# Altium PCB Sonar_Amp_Mcu_PCB.PcbDoc
Units mm, origin at the board's own origin, x right, y up, seen from the top; angles counter-clockwise.
Board outline 34 x 22 mm, 2 copper layers (Top Layer, Bottom Layer); 3 components, 16 nets, 32 pads, 0 vias.
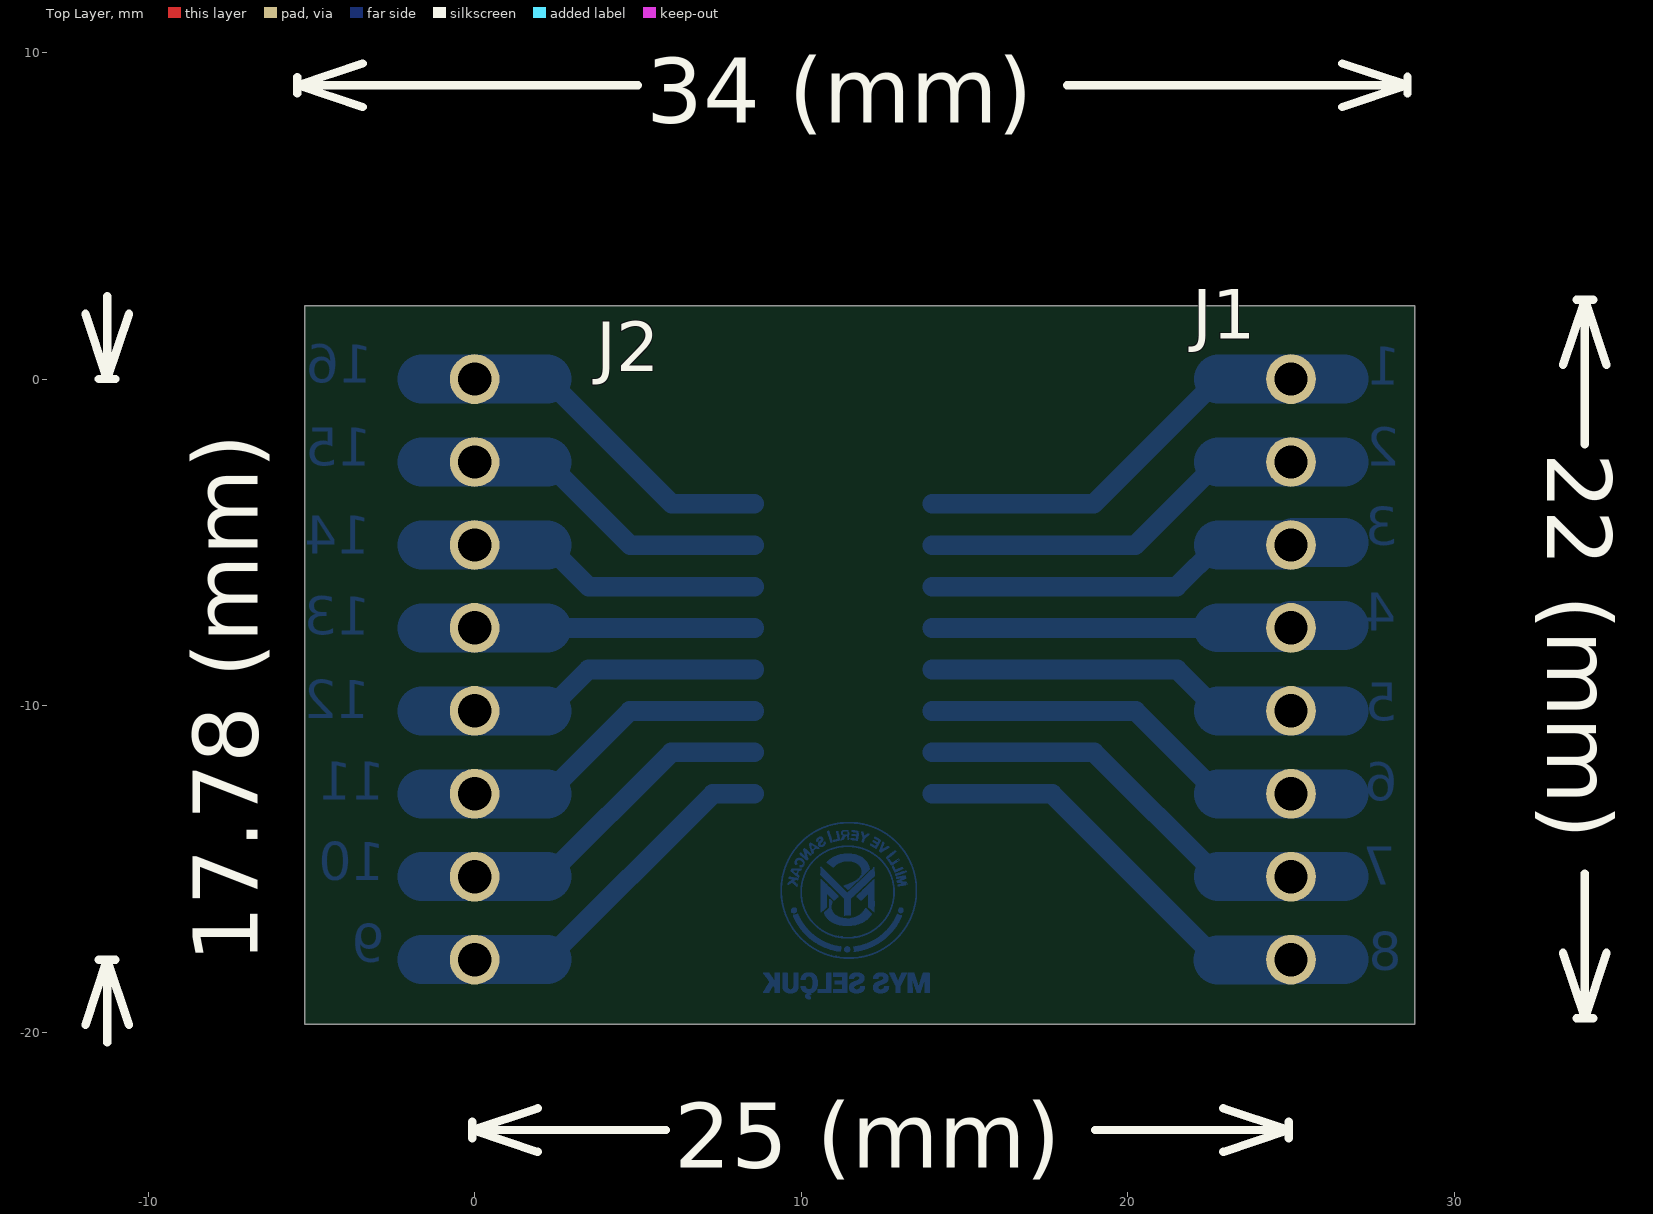
[diagram p0: Top Layer view]
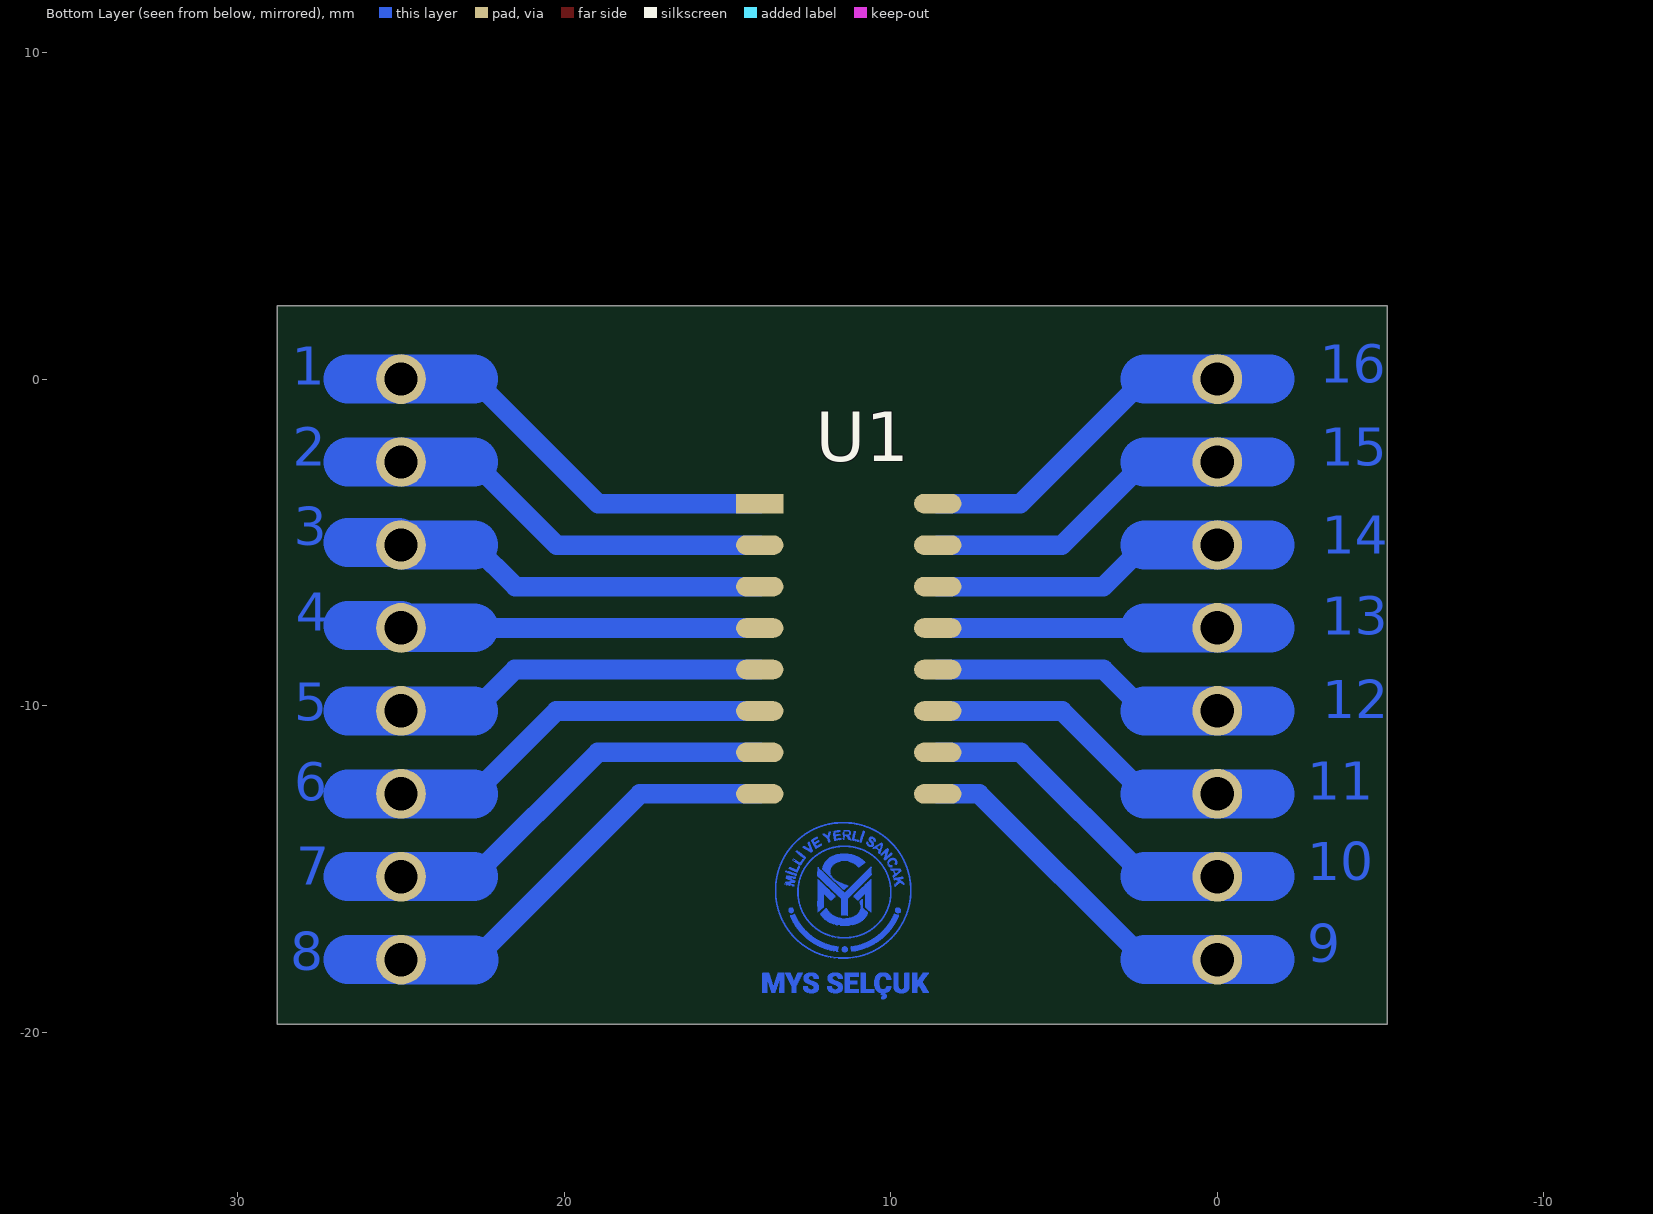
[diagram p1: Bottom Layer view, seen from below]

## Layer stack, top to bottom
Top Solder: solder mask 0.0102, Solder Resist, Dk 3.5
Top Layer: signal copper 0.0356
Dielectric 1: dielectric 0.32, FR-4, Dk 4.8
Bottom Layer: signal copper 0.0356
Bottom Solder: solder mask 0.0102, Solder Resist, Dk 3.5

## Board outline
-5.21,-19.759 -5.21,2.241 28.79,2.241 28.79,-19.759

## Design rules (kind name [scope] priority, off if disabled: settings)
Clearance [All] p1: gap=0.254 ignorepadtopadclearanceinfootprint=FALSE except(0.152: Track-SMDPad SMDPad-SMDPad SMDPad-THPad)
PolygonConnect [All] p1: connectstyle=Relief reliefconductorwidth=0.254 reliefentries=4 polygonreliefangle="90 Angle" airgapwidth=0.254
RoutingVias [All] p1: holewidth=0.711 width=1.27 viastyle="Through Hole" minholewidth=0.711 minwidth=1.27 maxholewidth=0.711 maxwidth=1.27
SolderMaskExpansion [All] p1: expansion=0.102 istentingtop=FALSE
Width [All] p1: maxlimit=1.5 minlimit=0.1 preferedwidth=0.2 minimp=50.000000 maximp=50.000000 favimp=50.000000
30 further rules are at their usual default settings.

## Components (designator, comment, footprint, x,y, rotation, side; value= is the part's Value field where it differs from the comment)
J1 "Header 1x8" "Header 1x8" 25,0 r270 top
J2 "Header 1x8" "Header 1x8" 0,0 r270 top
U1 "AD605" SOIC127P600X175-16N 11.29,-8.259 r180 bottom

## Footprints (in the part's own frame and the unit in brackets; to place one, negate y for a bottom-side part, rotate by r counter-clockwise, add the part's x,y. Pads: shape width x height; smd on the part's side, far side on the other; paste and mask are expansions set on the pad)
"Header 1x8" [mil]
  round 60 hole 40.16: 1(0,0) 2(100,0) 3(200,0) 4(300,0) 5(400,0) 6(500,0) 7(600,0) 8(700,0)
  body extent -50,-50 750,50, height 374
SOIC127P600X175-16N [mm] "SOIC, 16-Leads, Body 9,90x3,90mm, Pitch 1,27mm, IPC Medium Density"
  rect 1.45x0.6 smd: 1(-2.725,4.445)
  oval 1.45x0.6 smd: 2(-2.725,3.175) 3(-2.725,1.905) 4(-2.725,0.635) 5(-2.725,-0.635) 6(-2.725,-1.905) 7(-2.725,-3.175) 8(-2.725,-4.445) 9(2.725,-4.445) 10(2.725,-3.175) 11(2.725,-1.905) 12(2.725,-0.635) 13(2.725,0.635) 14(2.725,1.905) 15(2.725,3.175) 16(2.725,4.445)
  body extent -3,-4.9 3,4.9, height 1.75

## Part data
J1 J2: "Header", ComponentLink3Description="Satın Alma Linki", ComponentLink3URL=https://www.robotistan.com/1x40-180-12mm
U1: ComponentLink1Description="Satın Alma Linki", ComponentLink1URL=https://karakoyelektronik.com/entegre-opamp/ad605arz-ad605-soic-16-smd-entegre-73227, ComponentLink2Description=Datasheet, ComponentLink2URL=https://www.analog.com/media/en/technical-documentation/data-sheets/ad605.pdf

## Nets (pads, with @x,y where several pads share a name; then routed paths per layer and width w, separated by ;. In a path a pad name is that pad's centre, name@x,y a point inside that pad or via, vN(x,y) a via of type N, cw(c..) or ccw(c..) an arc to the next point about the centre after c; other vN are vias at no path point)
NetJ1_1: J1.1 U1.1 | length 14.1
  Bottom Layer w0.6: U1.1 18.966,-3.814 22.78,0
  Bottom Layer w1.5: 22.78,0 J1.1 ; J1.1@25.079,0 26.619,0
NetJ1_2: J1.2 U1.2 | length 13.7
  Bottom Layer w0.6: U1.2 20.236,-5.084 22.78,-2.54
  Bottom Layer w1.5: 22.78,-2.54 J1.2 26.619,-2.54
NetJ1_3: J1.3 U1.3 | length 13.1
  Bottom Layer w0.6: U1.3 21.499,-6.354 22.774,-5.08
  Bottom Layer w1.5: 22.774,-5.08 J1.3 ; J1.3@25.079,-5 26.619,-5
NetJ1_4: J1.4 U1.4 | length 12.6
  Bottom Layer w0.6: U1.4 U1.4@14.44,-7.624 ; U1.4@14.45,-7.614 U1.4@14.44,-7.624 ; 22.769,-7.615 22.76,-7.624 U1.4@14.44,-7.624
  Bottom Layer w1.5: 22.769,-7.615 24.989,-7.615 J1.4@24.992,-7.612 ; J1.4@25,-7.54 26.619,-7.54
NetJ1_5: J1.5 U1.5 | length 13
  Bottom Layer w0.6: U1.5 21.514,-8.894 22.78,-10.16
  Bottom Layer w1.5: 22.78,-10.16 J1.5 ; J1.5@25.079,-10.16 26.619,-10.16
NetJ1_6: J1.6 U1.6 | length 13.7
  Bottom Layer w0.6: U1.6 20.244,-10.164 22.78,-12.7
  Bottom Layer w1.5: 22.78,-12.7 J1.6 26.619,-12.7
NetJ1_7: J1.7 U1.7 | length 14.1
  Bottom Layer w0.6: U1.7 18.974,-11.434 22.78,-15.24
  Bottom Layer w1.5: 22.78,-15.24 J1.7 ; J1.7@25.079,-15.24 26.619,-15.24
NetJ1_8: J1.8 U1.8 | length 14.7
  Bottom Layer w0.6: U1.8 17.688,-12.704 22.772,-17.788
  Bottom Layer w1.5: 22.772,-17.788 24.992,-17.788 J1.8@24.989,-17.785 ; J1.8 26.619,-17.78
NetJ2_1: J2.1 U1.16 | length 11.8
  Bottom Layer w0.6: 2.22,0 6.034,-3.814 U1.16
  Bottom Layer w1.5: -1.619,0 J2.1 2.22,0
NetJ2_2: J2.2 U1.15 | length 11.2
  Bottom Layer w0.6: 2.22,-2.54 4.764,-5.084 U1.15
  Bottom Layer w1.5: -1.619,-2.54 J2.2@-0.079,-2.54 ; J2.2 2.22,-2.54
NetJ2_3: J2.3 U1.14 | length 10.7
  Bottom Layer w0.6: 2.22,-5.08 3.494,-6.354 U1.14
  Bottom Layer w1.5: -1.615,-5.084 J2.3@0.004,-5.084 ; J2.3 2.22,-5.08
NetJ2_4: J2.4 U1.13 | length 10.1
  Bottom Layer w0.6: J2.4 J2.4@0.004,-7.624 ; 2.22,-7.62 2.224,-7.624 U1.13
  Bottom Layer w1.5: -1.615,-7.624 J2.4@-0.075,-7.624 ; J2.4 2.22,-7.62
NetJ2_5: J2.5 U1.12 | length 11.1
  Bottom Layer w0.6: 2.22,-10.16 3.486,-8.894 U1.12@8.14,-8.894 ; U1.12@8.137,-8.891 U1.12@8.14,-8.894 ; U1.12@8.14,-8.894 U1.12 U1.12@8.14,-8.894
  Bottom Layer w1.5: -1.619,-10.16 J2.5 2.22,-10.16
NetJ2_6: J2.6 U1.11 | length 11.2
  Bottom Layer w0.6: 2.22,-12.7 4.756,-10.164 U1.11
  Bottom Layer w1.5: -1.619,-12.7 J2.6@-0.079,-12.7 ; J2.6 2.22,-12.7
NetJ2_7: J2.7 U1.10 | length 11.8
  Bottom Layer w0.6: 2.22,-15.24 6.026,-11.434 U1.10
  Bottom Layer w1.5: -1.614,-15.235 J2.7@0.005,-15.235 ; J2.7 2.22,-15.24
NetJ2_8: J2.8 U1.9 | length 12.2
  Bottom Layer w0.6: J2.8 J2.8@0.005,-17.775 ; 2.22,-17.78 7.296,-12.704 U1.9
  Bottom Layer w1.5: -1.614,-17.775 J2.8@-0.074,-17.775 ; J2.8 2.22,-17.78

## Other copper
Bottom Layer:
  drawing of 44 lines, arcs and shapes, not listed
  text "16" at -3.136,-0.499 h2
  text "1" at 28.34,-0.564 h2
  text "15" at -3.171,-3.04 h2
  text "2" at 28.313,-3.035 h2
  text "3" at 28.291,-5.474 h2
  text "14" at -3.196,-5.736 h2
  text "4" at 28.223,-8.088 h2
  text "13" at -3.196,-8.216 h2
  text "12" at -3.21,-10.776 h2
  text "5" at 28.268,-10.853 h2
  text "11" at -2.756,-13.259 h2
  text "6" at 28.268,-13.29 h2
  text "10" at -2.756,-15.739 h2
  text "7" at 28.212,-15.869 h2
  text "9" at -2.756,-18.235 h2
  text "8" at 28.392,-18.49 h2

## Silkscreen, mask and mechanical layers (free items; w line width, h text height)
Top Overlay:
  lines w0.254: -11.921,-19.78 -11.254,-17.78 ; -11.921,2 -11.254,0 ; -11.508,-17.78 -11,-17.78 ; -11.508,0 -11,0 ; -11.254,-20.32 -11.254,-17.78 ; -11.254,2.54 -11.254,0 ; -10.587,-19.78 -11.254,-17.78 ; -10.587,2 -11.254,0 ; -5.429,8.745 -5.429,9.253 ; -3.429,8.333 -5.429,8.999 ; -3.429,9.666 -5.429,8.999 ; -0.071,-23.254 -0.071,-22.746 ; 1.929,-23.667 -0.071,-23 ; 1.929,-22.333 -0.071,-23 ; 5,9 -5.429,8.999 ; 5.858,-23 -0.071,-23 ; 18.142,9.001 28.571,9.001 ; 19,-23 24.929,-23 ; 22.929,-23.667 24.929,-23 ; 22.929,-22.333 24.929,-23 ; 24.929,-23.254 24.929,-22.746 ; 26.571,8.335 28.571,9.001 ; 26.571,9.668 28.571,9.001 ; 28.571,8.747 28.571,9.255 ; 33.333,-17.571 34,-19.571 ; 33.333,0.429 34,2.429 ; 33.746,-19.571 34.254,-19.571 ; 33.746,2.429 34.254,2.429 ; 34,-15.142 34,-19.571 ; 34,-2 34,2.429 ; 34.667,-17.571 34,-19.571 ; 34.667,0.429 34,2.429
  text "34 (mm)" at 5.254,7.848 h2
  text "22 (mm)" at 32.848,-2.254 h2 r270
  text "17.78 (mm)" at -6.646,-17.873 h2 r90
  text "25 (mm)" at 6.112,-24.152 h2